# EAGLE board G850V ESP8266 II v13 (EAGLE 9.7.0)
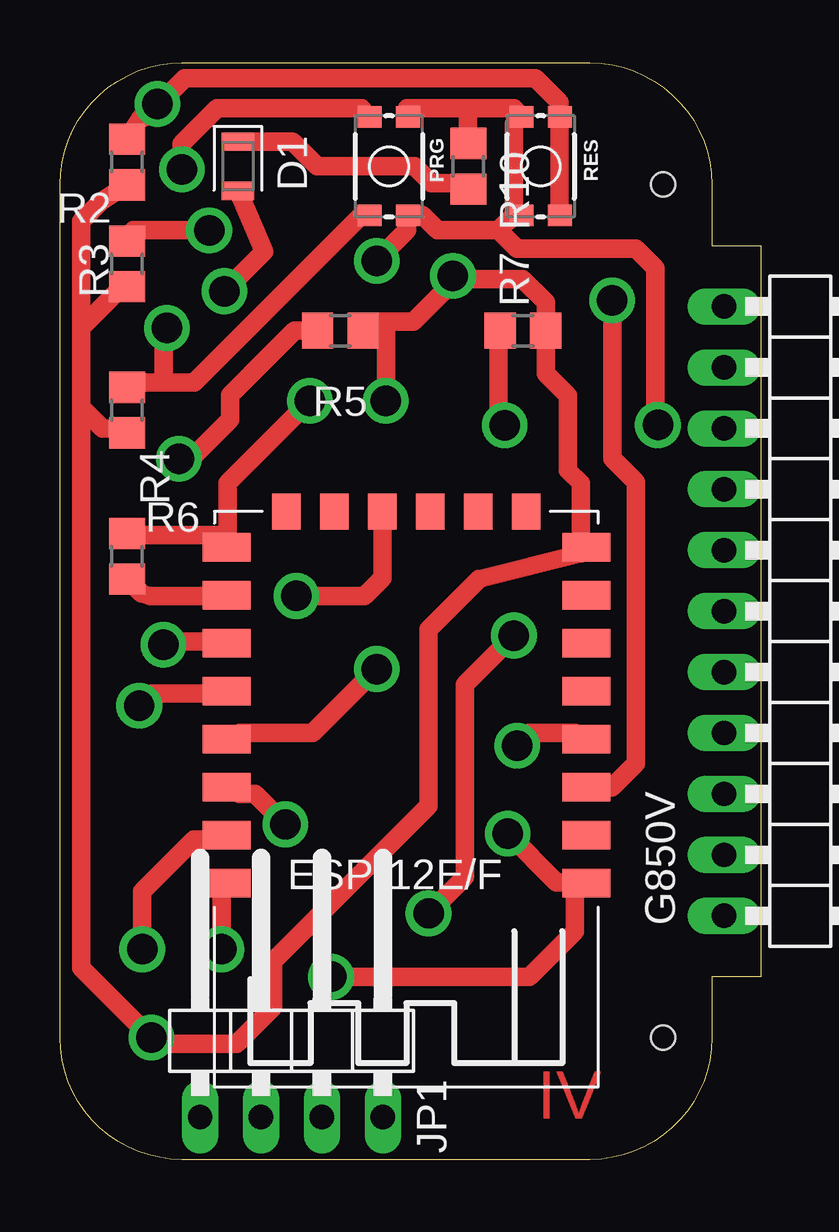
[diagram p0: board, top side]
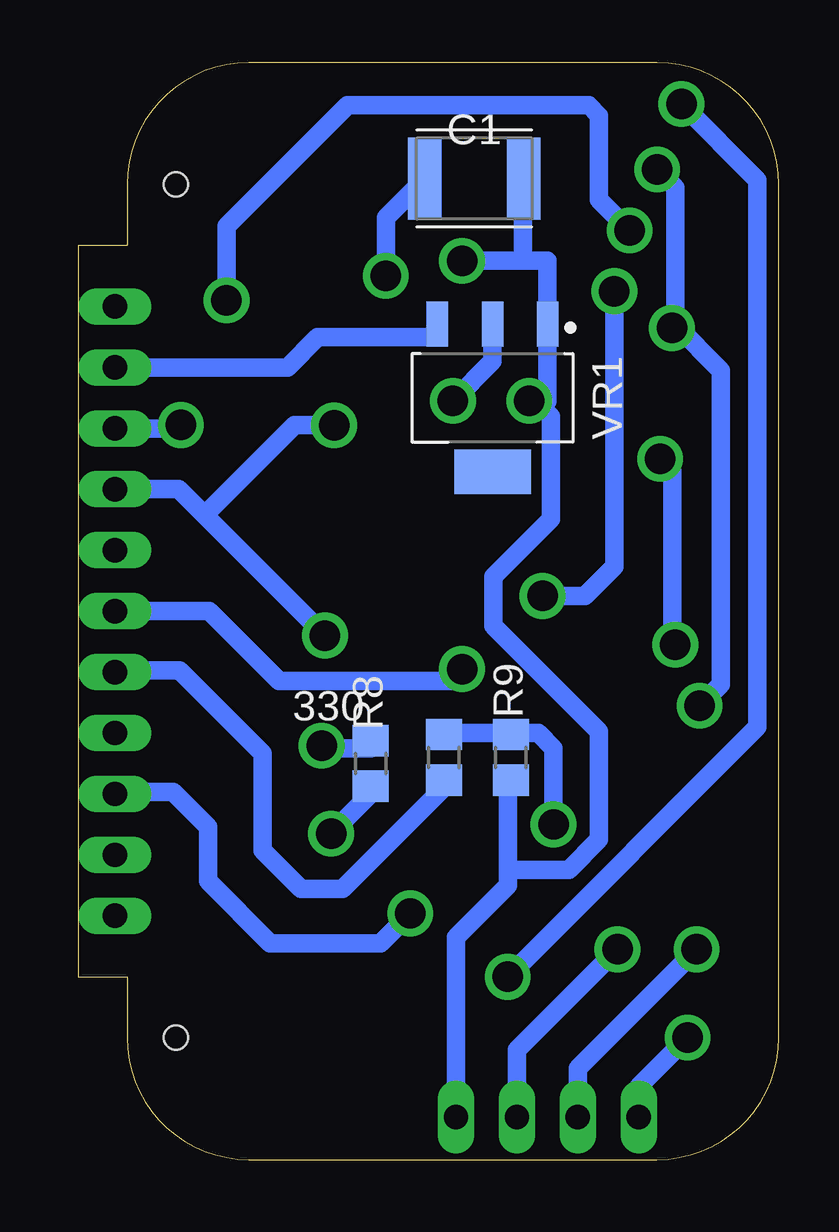
[diagram p1: board, bottom side, seen from below]

Size 29.21 x 45.72 mm. Coordinates in mm from the lower left corner, seen from the top.
Outline: 27.18,7.62 27.18,5.08 arc-90 22.1,0 5.08,0 arc-90 0,5.08 0,40.64 arc-90 5.08,45.72 22.1,45.72 arc-90 27.18,40.64 27.18,38.1 29.21,38.1 29.21,7.62 27.18,7.62
Copper layers (1*16): Top 0.035mm / dielectric 1.5mm / Bottom 0.035mm
Design rules "ESP-01 Power Module Eagle 8.2 B": minimum track width 10mil, minimum drill 24mil, track to track 0.205mm, track to pad 0.205mm, pad to pad 0.205mm, via to via 0.205mm, smd to smd 8mil, copper to edge 40mil, drill to drill 8mil, minimum pad ring 10mil, minimum via ring 8mil, stop-mask expansion 4mil, vias tented up to drill 0mil, thermal gap 10mil
Net classes: 0 default: width 0.762 mm, drill 1.27 mm, clearance 0.457 mm
Holes 1 mm at 25.15,40.64 25.15,5.08

## Footprints (pad centres in the part's own frame; a part is rotated, then mirrored left to right if it is on the bottom)
CAPC4532X135 = smd 1.397 x 3.415: 1 -2.057,0; 2 2.057,0
LEDC2012X110N_FLAT-B = smd 0.762 x 1.362: A 1.025,0; C -1.025,0
1X11/90 = drill 1.016 long: 1 -12.7,-3.81; 2 -10.16,-3.81; 3 -7.62,-3.81; 4 -5.08,-3.81; 5 -2.54,-3.81; 6 0,-3.81; 7 2.54,-3.81; 8 5.08,-3.81; 9 7.62,-3.81; 10 10.16,-3.81; 11 12.7,-3.81
ESP-12E = smd 2 x 1.2: ADC -7.46,5.53; EN -7.46,3.53; GND 7.54,-6.47; IO0 7.54,-0.47; IO2 7.54,-2.47; IO4 7.54,1.53; IO5 7.54,3.53; IO12 -7.46,-2.47; IO13 -7.46,-4.47; IO14 -7.46,-0.47; IO15 7.54,-4.47; IO16 -7.46,1.53; RST -7.46,7.53; RXD/IO3 7.54,5.53; TXD/IO1 7.54,7.53; VCC -7.46,-6.47 | smd 1.2 x 1.5: CS0 -4.96,-7.97; IO9 -0.96,-7.97; IO10 1.04,-7.97; MISO -2.96,-7.97; MOSI 3.04,-7.97; SCLK 5.04,-7.97
1X04/90 = drill 1.016 long: 1 -3.81,-3.81; 2 -1.27,-3.81; 3 1.27,-3.81; 4 3.81,-3.81
TACTILE_SWITCH_SMD_4.6X2.8MM = smd 0.9 x 1: 1 -2.05,-0.8; 2 2.05,-0.8; 3 2.05,0.8; 4 -2.05,0.8
R0805 = smd 1.3 x 1.5: 1 -0.95,0; 2 0.95,0
SOT230P700X170-4 = smd 1.86 x 0.898: 1 -3.075,2.3; 2 -3.075,0; 3 -3.075,-2.3 | smd 1.86 x 3.189: 4 3.075,0

## Placement (x,y rotation side)
C1  100uF  [CAPC4532X135]  12.7,40.89 0 bottom
D1  LED  [LEDC2012X110N_FLAT-B]  7.42,41.4 270 top
G850V  PINHD-1X11/90  [1X11/90]  31.5,22.86 270 top
IC1  ESP-12E/F  [ESP-12E]  14.48,19.05 180 top
JP1  PINHD-1X4/90  [1X04/90]  9.65,5.59 0 top
PRG  MOMENTARY-SWITCH-SPST-SMD-4.6X2.8MM  [TACTILE_SWITCH_SMD_4.6X2.8MM]  13.72,41.4 90 top
R1  330  [R0805]  17.02,16.51 90 bottom
R2  1K  [R0805]  2.79,41.58 270 top
R3  1K  [R0805]  2.79,37.34 270 top
R4  1K  [R0805]  2.79,31.24 270 top
R5  1K  [R0805]  11.68,34.54 0 top
R6  1K  [R0805]  2.79,25.15 270 top
R7  1K  [R0805]  19.3,34.54 0 top
R8  1K8  [R0805]  13.97,16.76 270 bottom
R9  3K3  [R0805]  11.18,16.76 90 bottom
R10  330  [R0805]  17.03,41.4 270 top
RES  MOMENTARY-SWITCH-SPST-SMD-4.6X2.8MM  [TACTILE_SWITCH_SMD_4.6X2.8MM]  20.04,41.4 270 top
VR1  NCP1117ST33T3G  [SOT230P700X170-4]  11.94,31.75 270 bottom

## Library data of the parts
C1 = Capacitor; CATEGORY: Capacitor
D1 = LED; CATEGORY: LED; COLOR: BLUE; DESCRIPTION: CHIP LED FLAT; SUB-CATEGORY: CHIP; TYPE: FLAT_TOP
G850V JP1 = Connector; CATEGORY: CONNECTOR; SUB-CATEGORY: PIN-HEADER
IC1 = esp-12e-f
PRG RES = SparkFun-Switches; PROD_ID: SWCH-13065
R1-R10 = eagle-ltspice; SPICEMODEL: NONE; SPICEPREFIX: R
VR1 = IC_Power-Management; CATEGORY: IC_Power-Management; MANUFACTURER: ON Semiconductor; MPN: NCP1117ST33T3G; OPERATING_TEMP: 0 to +125 °C; PART_STATUS: Active; ROHS_COMPLIANT: RoHS3 Compliant; SERIES: NCP1117, NCV1117; SUB-CATEGORY: Voltage Regulator; TYPE: Linear

## Nets
CD: G850V.8
CI: G850V.11
DSR: G850V.10
DTR: G850V.5
GND: C1.2 G850V.3 IC1.GND JP1.4 PRG.1 PRG.2 R6.1 R9.1 R10.1 RES.1 RES.2 VR1.1
N$1: IC1.RXD/IO3 JP1.2
N$2: IC1.IO15 R6.2
N$3: IC1.IO0 PRG.3 PRG.4 R4.1
N$4: IC1.TXD/IO1 JP1.3
N$5: G850V.1
N$6: IC1.IO2 R5.1
N$7: IC1.IO16 R1.2
N$8: IC1.RST R1.1 R2.1 RES.3 RES.4
N$9: IC1.IO5 R8.1 R9.2
N$10: IC1.EN R3.1
N$11: D1.A IC1.IO10
N$12: D1.C R10.2
RTS(4)CTS(9): G850V.4 G850V.9 R7.1
RX_G850: G850V.6 IC1.IO4
TX_G850: G850V.7 R8.2
VCC: C1.1 IC1.VCC JP1.1 R2.2 R3.2 R4.2 R5.2 R7.2 VR1.2
VSS: G850V.2 VR1.3

## Tracks (layer width: path | path; a pad name or v marks a point on that pad's centre or on a via)
GND  (via drill 1.27)
  Top 0.762: 14.48,39.37 15.11,39.37 15.75,38.73 18.29,38.73 | 18.92,39.37 18.29,38.73 | 17.02,43.81 18.92,43.81 RES.1 18.92,43.18 18.92,39.37 | 17.02,43.81 14.48,43.81 PRG.2 | 17.02,43.81 17.02,42.55 R10.1 | 18.92,39.37 RES.2 | R6.1 3.05,26.04 6.86,26.04 IC1.GND 6.99,25.56 6.99,28.19 v10.41,31.62 | 14.48,39.37 14.48,38.73 v13.21,37.47 | 14.48,39.37 PRG.1 | v24.93,30.62 24.82,30.73 24.82,37.16 24,37.97 19.05,37.97 18.29,38.73
  Bottom 0.762: 11.3,12.06 11.3,11.43 13.46,9.27 JP1.4 | 11.3,12.06 11.3,15.24 R9.1 | C1.2 10.67,40.87 10.67,37.47 | 11.3,12.06 8.76,12.06 7.49,13.34 7.49,17.84 11.9,22.25 11.9,24.3 9.51,26.69 9.51,30.97 10.16,31.62 v10.41,31.62 9.65,31.62 9.65,34.81 VR1.1 9.65,34.84 9.65,37.47 10.67,37.47 | 10.67,37.47 v13.21,37.47 | 25.83,30.48 25.07,30.48 v24.93,30.62 | G850V.3 25.83,30.48 | 25.83,30.48
N$1  (via drill 1.27)
  Top 0.762: v3.43,8.76 3.43,11.18 5.59,13.34 6.86,13.34 IC1.RXD/IO3
  Bottom 0.762: v3.43,8.76 8.38,3.81 JP1.2
N$2
  Top 0.762: R6.2 3.4,23.59 3.75,23.5 6.86,23.5 IC1.IO15
N$3  (via drill 1.27)
  Top 0.762: 4.32,32.38 3.05,32.38 R4.1 | 4.32,32.38 5.59,32.38 12.57,39.37 PRG.4 | PRG.3 12.57,43.81 6.56,43.81 5.08,42.34 v5.08,41.27 | IC1.IO0 6.85,19.43 3.81,19.43 v3.3,18.92 | 4.32,32.38 4.32,34.52 v4.46,34.66
  Bottom 0.762: v5.08,41.27 4.32,40.51 4.32,34.8 | v3.3,18.92 2.41,19.81 2.41,32.89 4.32,34.8 | v4.46,34.66 4.32,34.8
N$4  (via drill 1.27)
  Top 0.762: IC1.TXD/IO1 6.73,11.31 v6.73,8.76
  Bottom 0.762: JP1.3 10.92,4.57 v6.73,8.76
N$6  (via drill 1.27)
  Top 0.762: v4.32,21.46 4.45,21.59 6.86,21.59 IC1.IO2 | R5.1 9.79,34.54 7.1,31.86 7.1,30.85 5.46,29.21 v4.95,29.21
  Bottom 0.762: v4.32,21.46 4.45,21.59 4.45,28.7 v4.95,29.21
N$7  (via drill 1.27)
  Top 0.762: IC1.IO16 21.46,17.78 19.56,17.78 19.06,17.29 v19.06,17.25
  Bottom 0.762: R1.2 17.02,17.14 18.95,17.14 v19.06,17.25
N$8  (via drill 1.27)
  Top 0.762: v18.67,13.59 20.7,11.56 21.91,11.56 IC1.RST 21.46,11.43 21.46,9.51 19.58,7.62 v11.3,7.62 | RES.3 20.83,39.37 20.83,43.18 RES.4 20.82,44.08 19.82,45.07 5.19,45.07 4.13,44.01 v4.06,44.01 3.49,43.43 3.37,43.43 R2.1
  Bottom 0.762: v18.67,13.59 17.02,15.24 R1.1 | v11.3,7.62 0.89,18.03 0.89,40.83 v4.06,44.01
N$9  (via drill 1.27)
  Top 0.762: v9.4,13.97 8.13,15.24 7.49,15.24 IC1.IO5
  Bottom 0.762: R8.1 13.84,17.78 11.3,17.78 R9.2 10.67,17.78 10.03,17.78 9.4,17.14 v9.4,13.97
N$10  (via drill 1.27)
  Top 0.762: v6.22,38.73 3.05,38.73 R3.1 | IC1.EN 23.01,15.52 24,16.51 24,28.23 23.02,29.21 v23.02,35.81
  Bottom 0.762: v6.22,38.73 7.49,40.01 7.49,43.52 7.92,43.94 17.99,43.94 23.02,38.91 v23.02,35.81
N$11  (via drill 1.27)
  Top 0.762: v6.86,36.2 8.51,37.85 D1.A | IC1.IO10 13.44,24.23 12.7,23.5 v9.86,23.5
  Bottom 0.762: v6.86,36.2 6.86,24.71 8.08,23.5 v9.86,23.5
N$12
  Top 0.762: R10.2 16.78,40.71 15.49,40.71 14.78,41.41 10.72,41.41 9.7,42.43 D1.C
RTS(4)CTS(9)  (via drill 1.27)
  Top 0.762: v18.54,30.61 18.29,30.86 18.29,34.29 R7.1 | v15.37,10.26 16.88,11.77 16.88,19.8 v18.92,21.84
  Bottom 0.762: v18.54,30.61 20.19,30.61 23.94,26.86 | 23.94,26.86 25.02,27.94 G850V.4 | 23.94,26.86 v18.92,21.84 | v15.37,10.26 16.61,9.02 21.21,9.02 23.8,11.61 23.8,13.87 25.25,15.32 27.61,15.32 G850V.9
RX_G850  (via drill 1.27)
  Top 0.762: v13.21,20.45 10.54,17.78 7.49,17.78 IC1.IO4
  Bottom 0.762: v13.21,20.45 13.72,19.94 20.83,19.94 23.75,22.86 G850V.6
TX_G850
  Bottom 0.762: R8.2 13.97,15.5 18.18,11.29 19.93,11.29 21.51,12.88 21.51,16.92 24.99,20.4 27.61,20.4 G850V.7
VCC  (via drill 1.27)
  Top 0.762: R5.2 13.21,34.92 13.59,34.92 | v13.59,31.62 13.59,34.92 | 16.51,36.7 v16.38,36.83 | 0.89,31.37 1.78,30.48 2.41,30.48 R4.2 | 0.89,34.67 0.89,31.37 | 0.89,34.67 2.41,36.2 R3.2 | 0.89,34.67 0.89,39.12 1.71,39.93 R2.2 | 0.89,31.37 0.89,8 v3.81,5.08 4.06,4.83 7.37,4.83 8.89,6.35 8.89,8.26 15.37,14.73 15.37,22.1 17.47,24.2 21.69,25.27 IC1.VCC 21.72,25.74 21.72,28.19 21.18,28.72 21.18,31.84 20.25,32.77 R7.2 20.25,35.74 19.29,36.7 16.51,36.7 | 13.59,34.92 14.73,34.92 16.51,36.7
  Bottom 0.762: v13.59,31.62 11.94,33.27 VR1.2 | C1.1 16.38,39.27 v16.38,36.83 | JP1.1 5.84,3.05 v3.81,5.08
VSS
  Bottom 0.762: VR1.3 14.48,34.29 19.22,34.29 20.49,33.02 G850V.2

## Text on the board
Top: IV
bNames: 330